# Altium PCB JacdacBreadboardBc30Mount 134.PcbDoc
Units mm, origin at the board's own origin, x right, y up, seen from the top; angles counter-clockwise.
Board outline 7.6 x 16.8 mm, 2 copper layers (Top Layer, Bottom Layer), stack 1.525 mm thick; 1 components, 3 nets, 16 pads, 0 vias.
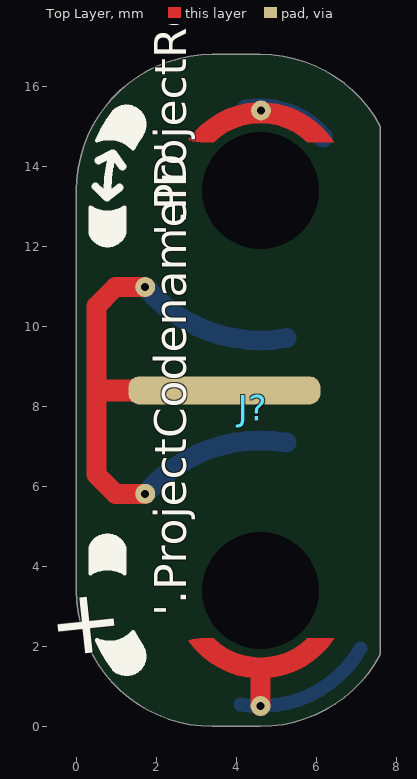
[diagram p0: Top Layer view]
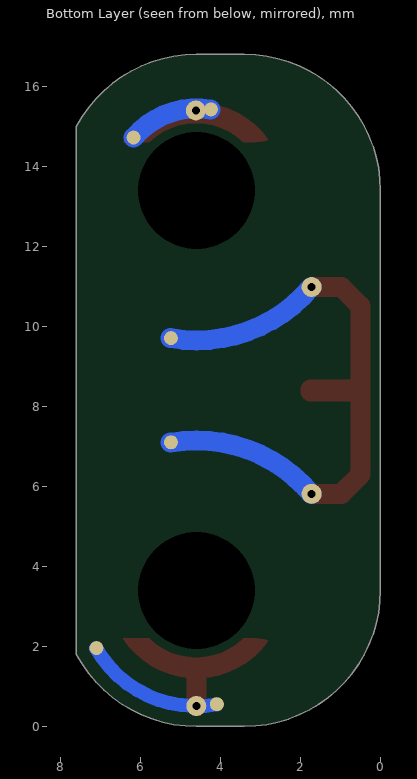
[diagram p1: Bottom Layer view, seen from below]

## Layer stack, top to bottom
Top Solder: solder mask 0.0102, Solder Resist, Dk 3.5
Top Layer: signal copper 0.0356
Dielectric 1: core 1.454, FR-4, Dk 4.2
Bottom Layer: signal copper 0.0356
Bottom Solder: solder mask 0.0102, Solder Resist, Dk 3.5

## Board outline
0,3.4 0,13.4 cw(c3.4,13.4) 3.4,16.8 4.6,16.8 cw(c4.6,13.4) 7.6,15 7.6,1.8 cw(c4.6,3.4) 4.6,0 3.4,0 cw(c3.4,3.4)

## Design rules (kind name [scope] priority, off if disabled: settings)
AssemblyTestPointUsage [All] p1: valid=2
BoardOutlineClearance [All] p1: gap=0.3 ignorepadtopadclearanceinfootprint=FALSE except(0: Arc-OutlineEdge Arc-SplitContinuation Track-OutlineEdge Track-SplitContinuation SMDPad-OutlineEdge SMDPad-SplitContinuation THPad-OutlineEdge THPad-SplitContinuation Via-OutlineEdge Via-SplitContinuation Fill-SplitContinuation Poly-SplitContinuation Region-OutlineEdge Region-SplitContinuation Text-OutlineEdge Text-SplitContinuation; 0.2: Fill-OutlineEdge Poly-OutlineEdge Region-CavityEdge Region-CutoutEdge Region-SplitBarrior Text-CavityEdge Text-CutoutEdge Text-SplitBarrior)
Clearance [All] p1: gap=0.13 ignorepadtopadclearanceinfootprint=FALSE
ComponentClearance MH5.0KeepoutaAreaClearance [InComponent('MH1') or InComponent('MH2')  or InComponent('MH3') or InComponent('MH4') vs InComponent('D6') or InComponent('D7') or InComponent('D8') or InComponent('D9') or InComponent('D10') or InComponent('D11') or InComponent('D12') or InComponent('D13') or InComponent('C6') or InComponent('C7') or InComponent('C8')  or  InComponent('C9') or  InComponent('C12')] p1: gap=0 collisioncheckmode=3 verticalgap=0 showdistances=FALSE
ComponentClearance [All] p2: gap=0.2 collisioncheckmode=3 verticalgap=0.2 showdistances=FALSE
DiffPairsRouting [All] p1: maxlimit=2 minlimit=0.15 mostfreqgap=0.15 toplayer_minwidth=0.15 toplayer_maxwidth=2 toplayer_prefwidth=0.15 bottomlayer_minwidth=0.15 bottomlayer_maxwidth=2 bottomlayer_prefwidth=0.15 maxuncoupledlength=25
FabricationTestPointUsage [All] p1: valid=2 allowmultiple=FALSE
HoleSize [All] p1: absolutevalues=TRUE maxlimit=5 minlimit=0.15 maxpercent=80.000 minpercent=20.000
HoleToHoleClearance [All] p1: gap=0.2 allowstackedmicrovias=TRUE
MinimumSolderMaskSliver [All] p1: minsoldermaskwidth=0.005
PlaneClearance [All] p1: clearance=0.2
PlaneConnect [All] p1: planeconnectstyle=Relief reliefexpansion=0.5 reliefentries=4 reliefconductorwidth=0.2 reliefairgap=0.3
PolygonConnect [All] p1: connectstyle=Direct reliefconductorwidth=0.2 reliefentries=4 polygonreliefangle="90 Angle" airgapwidth=0.2
RoutingVias RoutingVias_Power [InNetClass('Power')] p1: holewidth=0.4 width=0.8 viastyle="Through Hole" minholewidth=0.3 minwidth=0.6 maxholewidth=0.4 maxwidth=1
RoutingVias [All] p2: holewidth=0.3 width=0.6 viastyle="Through Hole" minholewidth=0.3 minwidth=0.6 maxholewidth=0.3 maxwidth=0.8
SilkToSilkClearance [All] p1: silktosilkclearance=0.001
SilkToSolderMaskClearance [IsPad] p1: minsilkscreentomaskgap=0.05 clearancetoexposedcopper=TRUE
SolderMaskExpansion [All] p1: expansion=0.075 istentingtop=FALSE
UnRoutedNet [All] p1: checkbadconnections=TRUE
ViasUnderSMD [not ( HasFootprint('JACDAC_EDGE_CONNECTOR_NO_TRACES') or HasFootprint('JACDAC_EDGE_CONNECTOR_NO_TRACES_CABLE_GUIDE') )] p1: allowed=FALSE
Width Width_Power [InNetClass('Power')] p1: maxlimit=1 minlimit=0.2 preferedwidth=0.5
Width [All] p2: maxlimit=1 minlimit=0.13 preferedwidth=0.13 minimp=50.000000 maximp=50.000000 favimp=50.000000
18 further rules are at their usual default settings.

## Components (designator, comment, footprint, x,y, rotation, side; value= is the part's Value field where it differs from the comment)
J? "Jacdac breadboard double washer all signals" "jacdac bc30-8 fr4-adapter jlc" 3.7,8.4 r0 top

## Footprints (in the part's own frame and the unit in brackets; to place one, negate y for a bottom-side part, rotate by r counter-clockwise, add the part's x,y. Pads: shape width x height; smd on the part's side, far side on the other; paste and mask are expansions set on the pad)
"jacdac bc30-8 fr4-adapter jlc" [mm]
  rrect78% 4.3x0.9 on Mech1 paste-1 mask+0: 1(0.25,1.27)
  round 0.35 smd far side paste-1 mask+0: 1(0.537,7.026) 1(2.47,6.32) 2(1.537,-1.297) 2(1.537,1.307) 3(0.39,-7.846) 3(3.4,-6.442)
  round 0.5 hole 0.2 mask+0: 1(0.914,6.999) 2(-1.98,-2.584) 2(-1.98,2.584) 3(0.903,-7.89)
  rrect78% 4.8x0.7 smd paste-1 mask+0: 2(0,0)
  rrect78% 4.8x0.9 on Mech1 paste-1 mask+0: 2(0,0) 3(0,-1.27)
  round 0 hole 2.93 unplated mask+0.6: 16(0.9,-5) 16(0.9,5)
  Top Layer region: -0.9,-6.258 -0.098,-6.956 0.937,-7.196 1.964,-6.923 2.744,-6.201 2.744,-6.201 2.744,-6.2 2.075,-6.2 1.33,-6.622 0.474,-6.622 -0.271,-6.2 -0.271,-6.2 -0.273,-6.199 -0.598,-6.199 -0.752,-6.214 -0.9,-6.258
  Top Layer region: -0.9,6.263 -0.098,6.961 0.937,7.201 1.964,6.928 2.744,6.205 2.744,6.205 2.744,6.205 2.075,6.205 1.33,6.627 0.474,6.627 -0.271,6.205 -0.271,6.205 -0.273,6.203 -0.598,6.203 -0.752,6.218 -0.9,6.263
  Top Layer lines w0.5: -3.2,-0.025 -3.2,2.107 -2.723,2.584 -1.98,2.584 ; -3.2,0.025 -3.2,-2.107 -2.723,-2.584 -1.98,-2.584 ; -3.1,-0.025 -1.95,-0.025 -3.075,-0.025 -3.1,0 -3.075,0.025 -1.95,0.025 -3.1,0.025 ; 0.9,-7.89 0.9,-6.95
  Bottom Layer lines w0.35: 0.397,-7.851 ccw(c0.9,-5) 3.407,-6.448
  Bottom Layer lines w0.5: -1.973,-2.59 cw(c0.9,-5) 1.551,-1.307 ; -1.973,2.59 ccw(c0.9,5) 1.551,1.307 ; 0.544,7.019 cw(c0.9,5) 2.47,6.318
  silkscreen extent -3.35,-7.1 -2,7.1, body extent -3.45,-8.07 3.58,7.3, height 0.05

## Part data
J?: Hole Clearance=7.0mm, Hole Size=M3

## Nets (pads, with @x,y where several pads share a name; then routed paths per layer and width w, separated by ;. In a path a pad name is that pad's centre, name@x,y a point inside that pad or via, vN(x,y) a via of type N, cw(c..) or ccw(c..) an arc to the next point about the centre after c; other vN are vias at no path point)
GND: J?.2@1.72,5.816 J?.2@1.72,10.984 J?.2@3.7,8.4 J?.2@5.237,7.103 J?.2@5.237,9.707
JD_DATA: J?.1@4.237,15.426 J?.1@4.614,15.399 J?.1@6.17,14.72
JD_PWR: J?.3@4.09,0.554 J?.3@4.603,0.51 J?.3@7.1,1.958
pads on no net: J?.1@3.95,9.67 J?.2@3.7,8.4 J?.3@3.7,7.13 J?.16

## Silkscreen, mask and mechanical layers (free items; w line width, h text height)
Top Overlay:
  text "'.ProjectRevision'" at 2.75,12.25 h0.8 r90
  text "'.ProjectCodenameID'" at 2.75,2.75 h0.8 r90
Route Tool Path:
  lines w2: 8.481,19 -1,19 -1,13.4 cw(c3.4,13.4) 3.4,17.8 ; 8.481,-1.1 -1,-1.1 -1,3.397 ccw(c3.4,3.4) 3.397,-1 ; 8.6,-1.1 8.6,3.397 8.6,1.8 ; 8.6,13.403 8.6,19 ; 3.397,-1 ccw(c3.4,0) 3.4,-1 ; 3.397,-1 ccw(c3.4,3.4) 3.4,-1 ; 3.4,-1 4.6,-1 ccw(c4.6,3.4) 8.482,1.329 ; 3.4,17.8 4.6,17.8 ; 3.4,17.8 3.4,17.8 ; 4.6,17.8 cw(c4.6,13.4) 4.603,17.8 ; 4.6,17.8 cw(c4.6,16.8) 4.603,17.8 ; 4.603,17.8 cw(c4.6,13.4) 8.481,15.473 ; 8.481,15.473 cw(c7.6,15) 8.6,15 ccw(c7.6,15) 8.482,15.471 ccw(c4.6,13.4) 8.481,15.473 ; 8.482,1.329 ccw(c7.6,1.8) 8.6,1.8 ; 8.482,1.329 ccw(c7.6,1.8) 8.6,1.8
Alignment:
  the board outline again, w0.1

## Text inside footprints (layer, text, board x,y; h text height)
J?: Top Overlay "+" at 1.381,3.59 h2.8 r96